# EAGLE board Simulation Access (EAGLE 9.7.0)

Size 233.68 x 148.78 mm. Coordinates in mm from the lower left corner, seen from the top.
Outline: 0,0 233.68,0 233.68,148.78 0,148.78 0,0
Copper layers (1*16): Top 0.035mm / dielectric 1.5mm / Bottom 0.035mm
Design rules "default": minimum track width 6mil, minimum drill 0.35mm, track to track 6mil, track to pad 6mil, pad to pad 6mil, via to via 6mil, smd to smd 6mil, copper to edge 40mil, drill to drill 6mil, minimum pad ring 10mil, minimum via ring 8mil, stop-mask expansion 4mil, vias tented up to drill 0mil, thermal gap 10mil

## Footprints (pad centres in the part's own frame; a part is rotated, then mirrored left to right if it is on the bottom)
HC-SR04 = drill 1.016 long: 1 -3.81,0; 2 -1.27,0; 3 1.27,0; 4 3.81,0
MOTOR = drill 1.118 pad 3.15 octagon: + 2.54,0; - -2.54,0
ARDUINO-UNO-R3-SHIELD = drill 1.016 pad 1.88: 3.3V 24.13,-2.54; 5V 24.13,0; A0 24.13,12.7; A1 24.13,15.24; A2 24.13,17.78; A3 24.13,20.32; A4 24.13,22.86; A5 24.13,25.4; AREF -24.13,-13.97; D2 -24.13,20.32; D3 -24.13,17.78; D4 -24.13,15.24; D5 -24.13,12.7; D6 -24.13,10.16; D7 -24.13,7.62; D8 -24.13,3.81; D9 -24.13,1.27; D10 -24.13,-1.27; D11 -24.13,-3.81; D12 -24.13,-6.35; D13 -24.13,-8.89; GND@0 24.13,2.54; GND@1 24.13,5.08; GND@2 -24.13,-11.43; IOREF 24.13,-7.62; NC 24.13,-10.16; RES 24.13,-5.08; RX -24.13,25.4; SCL -24.13,-19.05; SDA -24.13,-16.51; TX -24.13,22.86; VIN 24.13,7.62
TSOP48 = drill 0.8: 1 -2.54,0; 2 0,0; 3 2.54,0
DIP762W53P254L1969H508Q16B = drill 0.743 pad 1.343: 1 -3.81,8.89; 2 -3.81,6.35; 3 -3.81,3.81; 4 -3.81,1.27; 5 -3.81,-1.27; 6 -3.81,-3.81; 7 -3.81,-6.35; 8 -3.81,-8.89; 9 3.81,-8.89; 10 3.81,-6.35; 11 3.81,-3.81; 12 3.81,-1.27; 13 3.81,1.27; 14 3.81,3.81; 15 3.81,6.35; 16 3.81,8.89

## Placement (x,y rotation side)
DIST1  DISTANCE-SENSOR-4PINHC-SR04  [HC-SR04]  207.65,132.1 0 top
M2  MOTOR_HDR  [MOTOR]  50.27,57.29 90 top
M3  MOTOR_HDR  [MOTOR]  50.78,29.92 90 top
U1  ARDUINO-UNO-R3-SHIELD  [ARDUINO-UNO-R3-SHIELD]  113.09,118.93 270 top
U2  IR-RECEIVERTSOP48  [TSOP48]  13.03,10.16 0 top
U3  IR-RECEIVERTSOP48  [TSOP48]  10.16,81.31 270 top
U4  L293E  [DIP762W53P254L1969H508Q16B]  112.98,48.75 90 top

## Library data of the parts
DIST1 M2 M3 U1-U4 = Tinkercad

## Nets
M3_+: M2.+ M3.+ U4.6 U4.11
M3_-: M2.- M3.- U4.3 U4.14
U1_D2: U1.D2 U3.1
U1_D3: U1.D3 U2.1
U1_D7: DIST1.1 U1.5V U1.D4 U1.D7 U2.3 U3.3 U4.1 U4.8 U4.9 U4.16
U1_D8: U1.D6 U1.D8 U4.2 U4.15
U1_D9: U1.D5 U1.D9 U4.7 U4.10
U1_D10: DIST1.2 U1.D10
U1_D11: DIST1.3 U1.D11
U1_GND: DIST1.4 U1.GND@0 U1.GND@1 U1.GND@2 U2.2 U3.2 U4.4 U4.5 U4.12 U4.13

## Tracks (layer width: path | path; a pad name or v marks a point on that pad's centre or on a via)
M3_+  (3 unrouted)
M3_-  (3 unrouted)
U1_D2  (1 unrouted)
U1_D3  (1 unrouted)
U1_D7  (9 unrouted)
U1_D8  (3 unrouted)
U1_D9  (3 unrouted)
U1_D10  (1 unrouted)
U1_D11  (1 unrouted)
U1_GND  (9 unrouted)